# EAGLE board schema_v3_2_SMD_DIP (EAGLE 6.2)
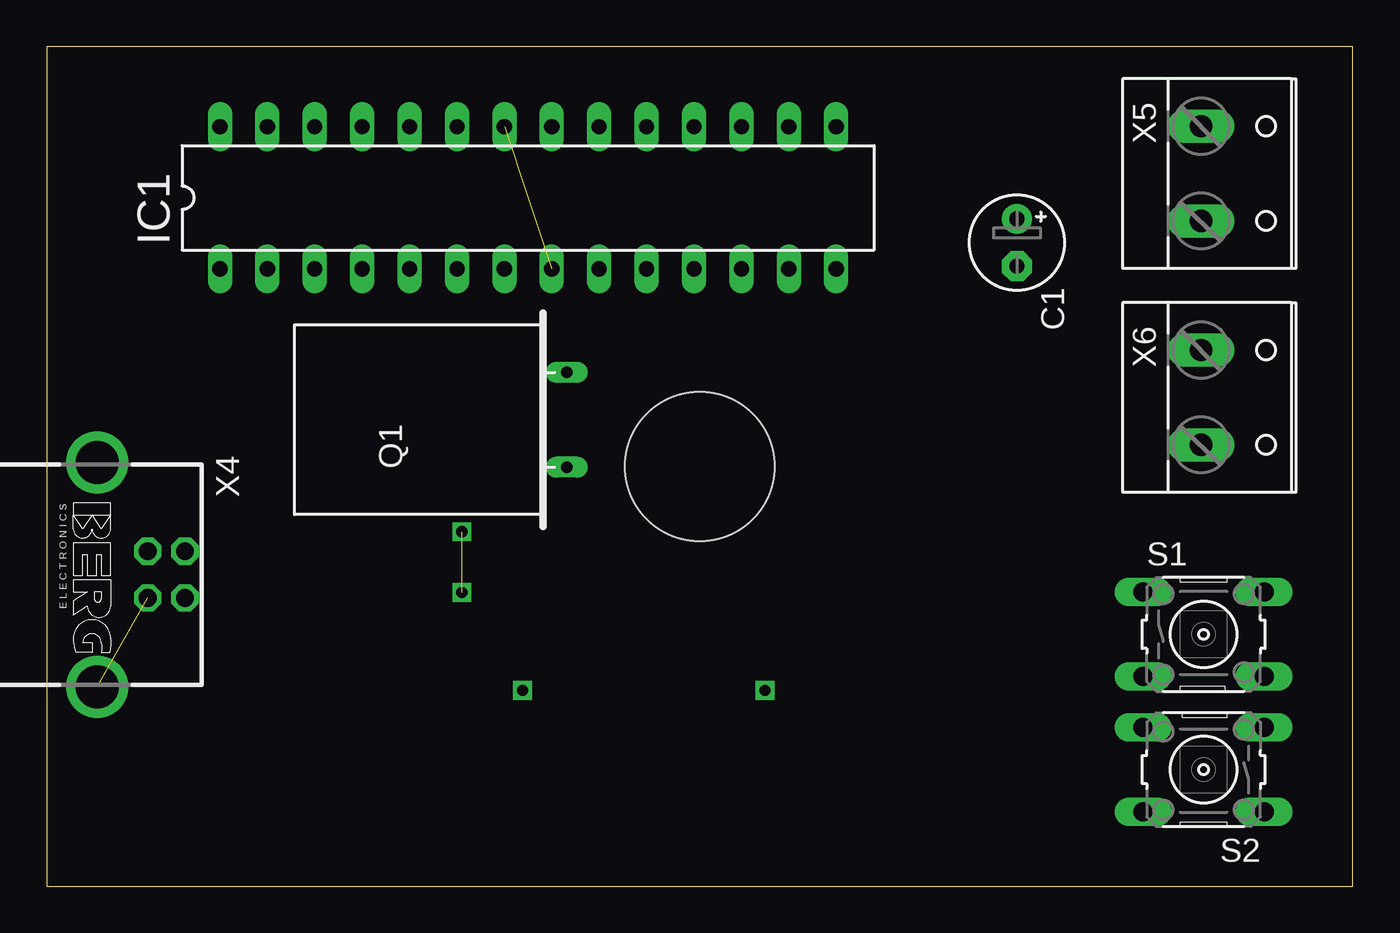
[diagram p0: board, top side]
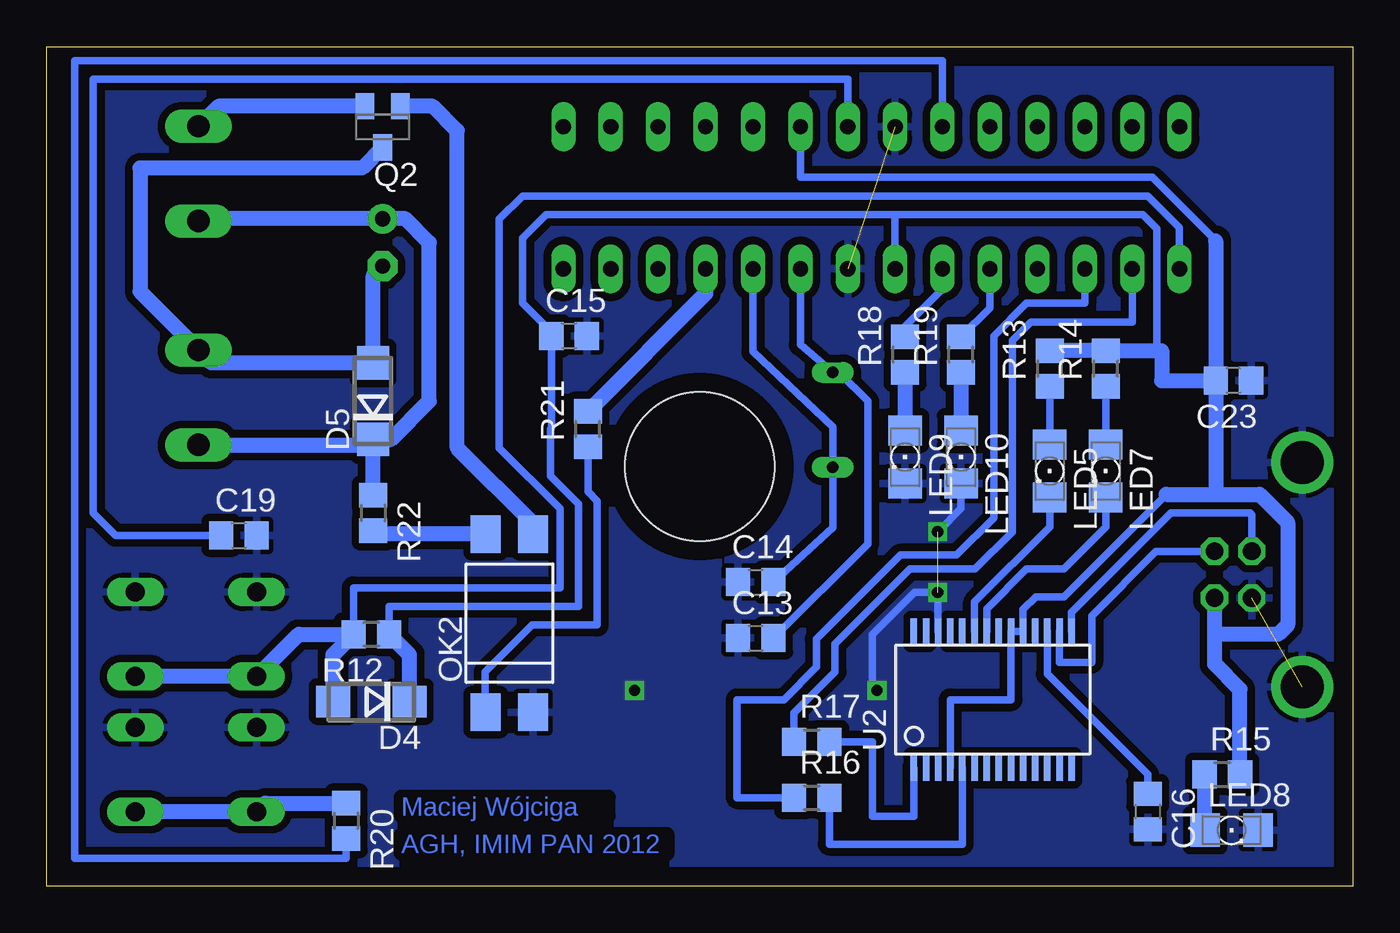
[diagram p1: board, bottom side, seen from below]

Size 70 x 45 mm. Coordinates in mm from the lower left corner, seen from the top.
Outline: 0,0 70,0 70,45 0,45 0,0
Copper layers (1*16): Top 0.035mm / dielectric 1.5mm / Bottom 0.035mm
Design rules: minimum track width 10mil, minimum drill 24mil, track to track 8mil, track to pad 8mil, pad to pad 8mil, via to via 8mil, smd to smd 8mil, copper to edge 40mil, drill to drill 8mil, minimum pad ring 10mil, minimum via ring 8mil, stop-mask expansion 4mil, vias tented up to drill 0mil, thermal gap 10mil
Net classes: 0 default: width 0.203 mm
Holes 8 mm at 35,22.5

## Footprints (pad centres in the part's own frame; a part is rotated, then mirrored left to right if it is on the bottom)
E2,5-5 = drill 0.813 pad 1.6: + -1.27,0 | drill 0.813 pad 1.6 octagon: - 1.27,0
C0805 = smd 1.3 x 1.5: 1 -0.95,0; 2 0.95,0
DO214AC = smd 1.8 x 1.7: A 2.05,0; C -2.05,0
DIL28-3 = drill 0.813 long: 1 -16.51,-3.81; 2 -13.97,-3.81; 3 -11.43,-3.81; 4 -8.89,-3.81; 5 -6.35,-3.81; 6 -3.81,-3.81; 7 -1.27,-3.81; 8 1.27,-3.81; 9 3.81,-3.81; 10 6.35,-3.81; 11 8.89,-3.81; 12 11.43,-3.81; 13 13.97,-3.81; 14 16.51,-3.81; 15 16.51,3.81; 16 13.97,3.81; 17 11.43,3.81; 18 8.89,3.81; 19 6.35,3.81; 20 3.81,3.81; 21 1.27,3.81; 22 -1.27,3.81; 23 -3.81,3.81; 24 -6.35,3.81; 25 -8.89,3.81; 26 -11.43,3.81; 27 -13.97,3.81; 28 -16.51,3.81
1206 = smd 1.6 x 1.803: A -1.422,0; C 1.422,0
DIL4-SMD = smd 1.6 x 2: 1 -1.27,-4.77; 2 1.27,-4.77; 3 1.27,4.77; 4 -1.27,4.77
Q = drill 0.61 long: 1 -2.54,-7.62; 2 2.54,-7.62
SOT23-BEC = smd 1 x 1.4: B -0.95,-1.1; C 0,1.1; E 0.95,-1.1
R0805 = smd 1.3 x 1.5: 1 -0.95,0; 2 0.95,0
B3F-10XX = drill 1.016 long: 1 -3.251,2.261; 2 3.251,2.261; 3 -3.251,-2.261; 4 3.251,-2.261
SSOP28DB = smd 0.348 x 1.397: 1 -4.225,-3.656; 2 -3.575,-3.656; 3 -2.925,-3.656; 4 -2.275,-3.656; 5 -1.625,-3.656; 6 -0.975,-3.656; 7 -0.325,-3.656; 8 0.325,-3.656; 9 0.975,-3.656; 10 1.625,-3.656; 11 2.275,-3.656; 12 2.925,-3.656; 13 3.575,-3.656; 14 4.225,-3.656; 15 4.225,3.656; 16 3.575,3.656; 17 2.925,3.656; 18 2.275,3.656; 19 1.625,3.656; 20 0.975,3.656; 21 0.325,3.656; 22 -0.325,3.656; 23 -0.975,3.656; 24 -1.625,3.656; 25 -2.275,3.656; 26 -2.925,3.656; 27 -3.575,3.656; 28 -4.225,3.656
PN61729-S = drill 0.95 octagon: 1 1.25,4.71; 2 -1.25,4.71; 3 -1.25,2.71; 4 1.25,2.71 | drill 2.3 pad 2.9: S1 -6.02,0; S2 6.02,0
W237-132 = drill 1.194 long: 1 -2.54,-0.635; 2 2.54,-0.635

## Placement (x,y rotation side)
C1  1uF  [E2,5-5]  52,34.5 270 top
C13  22pF  [C0805]  32,13.3 0 bottom
C14  22pF  [C0805]  32,16.3 0 bottom
C15  100nF  [C0805]  42,29.5 0 bottom
C16  100nF  [C0805]  11,4 270 bottom
C19  100nF  [C0805]  59.7,18.8 0 bottom
C23  100nF  [C0805]  6.4,27.1 180 bottom
D4  GS1B  [DO214AC]  52.6,9.9 180 bottom
D5  GS1B  [DO214AC]  52.5,26 90 bottom
IC1  MEGA8-P  [DIL28-3]  25.8,36.9 0 top
LED5  [1206]  16.25,22.25 270 bottom
LED7  [1206]  13.25,22.25 270 bottom
LED8  [1206]  6.5,3 0 bottom
LED9  [1206]  24,23 270 bottom
LED10  [1206]  21,23 270 bottom
OK2  SFH6206  [DIL4-SMD]  45.2,14.1 0 bottom
Q1  [Q]  20.25,25 90 top
Q2  BC817-16SMD  [SOT23-BEC]  52,40.7 180 bottom
R12  22k  [R0805]  52.6,13.5 180 bottom
R13  330  [R0805]  16.25,27.75 90 bottom
R14  330  [R0805]  13.25,27.75 90 bottom
R15  330  [R0805]  7,6 0 bottom
R16  1k  [R0805]  29,4.75 0 bottom
R17  1k  [R0805]  29,7.75 0 bottom
R18  330  [R0805]  24,28.5 90 bottom
R19  330  [R0805]  21,28.5 90 bottom
R20  330  [R0805]  53.95,3.5 270 bottom
R21  1k  [R0805]  41,24.5 90 bottom
R22  10k  [R0805]  52.5,20 270 bottom
S1  [B3F-10XX]  62,13.5 0 top
S2  [B3F-10XX]  62,6.25 180 top
U2  [SSOP28DB]  19.3,10 0 bottom
X4  PN61729-S  [PN61729-S]  2.7,16.7 270 top
X5  [W237-132]  62.5,38.2 270 top
X6  [W237-132]  62.5,26.2 270 top

## Library data of the parts
C1 C13-C16 C19 C23 R12-R22 = rcl
D4 D5 = diode
IC1 = atmel; OC_FARNELL: unknown; OC_NEWARK: unknown
LED5 LED7-LED10 = led
OK2 = optocoupler; MF: VISHAY/TELEFUNKEN; MPN: SFH6206-3; OC_FARNELL: 1469585; OC_NEWARK: 58K2214
Q1 = special
Q2 = transistor-npn
S1 S2 = switch-omron; MPN: B3F-1000; OC_FARNELL: 176432; OC_NEWARK: 36M3542
U2 = ftdichip-5
X4 = con-berg; OC_FARNELL: unknown; OC_NEWARK: unknown
X5 X6 = con-wago-508; OC_FARNELL: unknown; OC_NEWARK: unknown

## Nets
5V: C15.1 C23.2 D4.C IC1.7 IC1.20 R12.1 R13.2 R14.2 R15.2 U2.4 U2.19 U2.20 X4.1
AGND: U2.25
GND: C13.1 C14.1 C15.2 C16.2 C19.2 C23.1 IC1.8 IC1.22 LED8.C LED9.C LED10.C OK2.2 S1.1 S1.2 S2.3 S2.4 U2.26 X4.4 X4.S1 X4.S2
GND1: U2.7
GND2: U2.18
GND3: U2.21
N$1: IC1.3 R16.1
N$2: IC1.2 R17.1
N$3: C19.1 IC1.21
N$4: C14.2 IC1.10 Q1.1
N$5: C13.2 IC1.9 Q1.2
N$38: D4.A IC1.1 R12.2 S1.3 S1.4
N$39: LED5.A R13.1
N$40: LED7.A R14.1
N$41: LED5.C U2.23
N$42: LED7.C U2.22
N$43: R16.2 U2.5
N$44: R17.2 U2.1
N$45: R20.1 S2.1 S2.2
N$46: IC1.6 R18.2
N$48: U2.16 X4.2
N$49: U2.15 X4.3
N$50: IC1.5 R19.2
N$51: LED8.A R15.1
N$52: IC1.23 R20.2
N$96: C16.1 U2.17
N$97: LED9.A R18.1
N$98: LED10.A R19.1
N$101: OK2.3 Q2.B
N$102: OK2.1 R21.1
N$103: IC1.11 R21.2
N$104: OK2.4 R22.2
N$105: C1.+ D5.C R22.1 X5.2 X6.2
N$106: C1.- D5.A Q2.C X6.1
N$107: Q2.E X5.1

## Tracks (layer width: path | path; a pad name or v marks a point on that pad's centre or on a via)
5V
  Bottom 0.406: 10,21 15.5,15.5 17,15.5 17.68,14.82 U2.19 U2.20 18.32,10 21.57,10 U2.4 | 7.35,21.15 7.5,21 | R12.1 51.65,15 41.5,15 41.5,20.5 43,22 43,24.5 42.95,24.55 C15.1 42.95,29.7 44.5,31.25 44.5,34.75 43.25,36 24.53,36 | R13.2 16.25,28.75 | IC1.7 24.53,36 | 24.53,36 11.25,36 10.5,35.25 10.5,28.7 | IC1.20 29.61,38 10.75,38 7.35,34.6
  Bottom 0.813: R15.2 6.05,10.55 7.41,11.91 7.41,13.5 | 7.41,13.5 X4.1 | 10,21 7.5,21 5,21 3.5,19.5 3.5,14 4,13.5 7.41,13.5 | C23.2 7.35,21.15 | D4.C 50.55,12.4 R12.1 | R13.2 R14.2 10.5,28.7 10.25,28.7 10.25,27.1 C23.2 | 7.35,34.6 C23.2
GND  (via drill 0.6)  (3 unrouted)
  Bottom 0.406: U2.26 22.25,13.68 v22.25,15.75 23.5,15.75 25.75,13.5 25.75,10.75 v25.5,10.5 | v22.25,19 21,20.25 LED10.C
  other vias: 38.5,10.5
  pour Bottom (isolate 0.406): 0,45 70,45 70,0 0,0
N$1
  Bottom 0.406: 30,4.75 R16.1 33,4.75 33,10 30.5,10 28.75,11.75 28.75,13.25 24.25,17.75 21.25,17.75 19.25,19.75 19.25,29.5 17.5,31.25 14.37,31.25 IC1.3
N$2
  Bottom 0.406: R17.1 29.95,9.3 27.75,11.5 27.75,13 23.75,17 20.25,17 18.25,19 18.25,29.25 17.25,30.25 11.83,30.25 IC1.2
N$3
  Bottom 0.406: IC1.21 27.07,43.25 67.5,43.25 67.5,20 66.3,18.8 C19.1
N$4
  Bottom 0.406: C14.2 27.87,19.23 Q1.1 27.87,24.62 32.15,28.65 IC1.10
N$5
  Bottom 0.406: C13.2 26,18.35 26,26 27.54,27.54 Q1.2 29.61,29.03 IC1.9
N$38
  Bottom 0.406: R12.2 53.55,16 42.5,16 42.5,20.25 45.75,23.5 45.75,35.75 44.5,37 11,37 9.29,35.29 IC1.1
  Bottom 0.813: D4.A 54.65,12.4 R12.2 56.49,13.5 S1.3 S1.4
N$39
  Bottom 0.406: R13.1 LED5.A
N$40
  Bottom 0.406: R14.1 LED7.A
N$41
  Bottom 0.406: U2.23 20.27,15.22 16.25,19.25 LED5.C
N$42
  Bottom 0.406: U2.22 19.62,14.88 17.5,17 15.5,17 13.25,19.25 LED7.C
N$43
  Bottom 0.406: R16.2 28.05,2.25 20.93,2.25 U2.5
N$44
  Bottom 0.406: R17.2 25.75,7.75 25.75,3.75 23.52,3.75 U2.1
N$45
  Bottom 0.813: S2.1 S2.2 58.29,4.45 R20.1
N$46
  Bottom 0.406: R18.2 24,30 22,32 IC1.6
N$48
  Bottom 0.406: X4.2 10.55,17.95 14,14.5 14,12 15.72,12 U2.16
N$49
  Bottom 0.406: X4.3 5.41,19.91 5.5,20 9.75,20 15.07,14.68 U2.15
N$50
  Bottom 0.406: IC1.5 19.45,31 R19.2
N$51
  Bottom 0.406: 7.95,3.03 LED8.A
  Bottom 0.813: R15.1 7.95,3.03
N$52
  Bottom 0.406: IC1.23 21.99,44.25 68.5,44.25 68.5,1.5 53.95,1.5 R20.2
N$96
  Bottom 0.406: U2.17 16.38,11.38 11,6 C16.1
N$97
  Bottom 0.813: R18.1 LED9.A
N$98
  Bottom 0.813: R19.1 LED10.A
N$101
  Bottom 0.406: OK2.3 43.93,19.43
  Bottom 0.813: Q2.B 49.3,41.8 48,40.5 48,23.5 43.93,19.43
N$102
  Bottom 0.406: OK2.1 46.5,9.36 46.5,11.5 44,14 40.5,14 40.5,20.65 41,21.15 R21.1
N$103
  Bottom 0.813: IC1.11 34.69,31.76 R21.2
N$104
  Bottom 0.406: 52.32,18.87 R22.2
  Bottom 0.813: OK2.4 52.32,18.87
N$105
  Bottom 0.406: 52.79,23.66 D5.C | 61.76,35.77 arc-90 X5.2
  Bottom 0.813: R22.1 D5.C 51.55,23.95 49.5,26 49.5,34.5 50.77,35.77 C1.+ 61.76,35.77 | X6.2 52.79,23.66
N$106
  Bottom 0.813: C1.- 52.5,32.73 D5.A 61.17,28.05 X6.1 65,31.88 65,38.5 53.1,38.5 Q2.C
N$107
  Bottom 0.813: Q2.E 60.8,41.8 X5.1

## Text on the board
Bottom: Maciej Wójciga | AGH, IMIM PAN 2012